# Altium PCB PCB2.PcbDoc
Units mil, origin at the board's own origin, x right, y up, seen from the top; angles counter-clockwise.
Board outline 1968.58 x 1968.74 mil, 2 copper layers (Top Layer, Bottom Layer); 26 components, 8 nets, 61 pads, 6 vias.
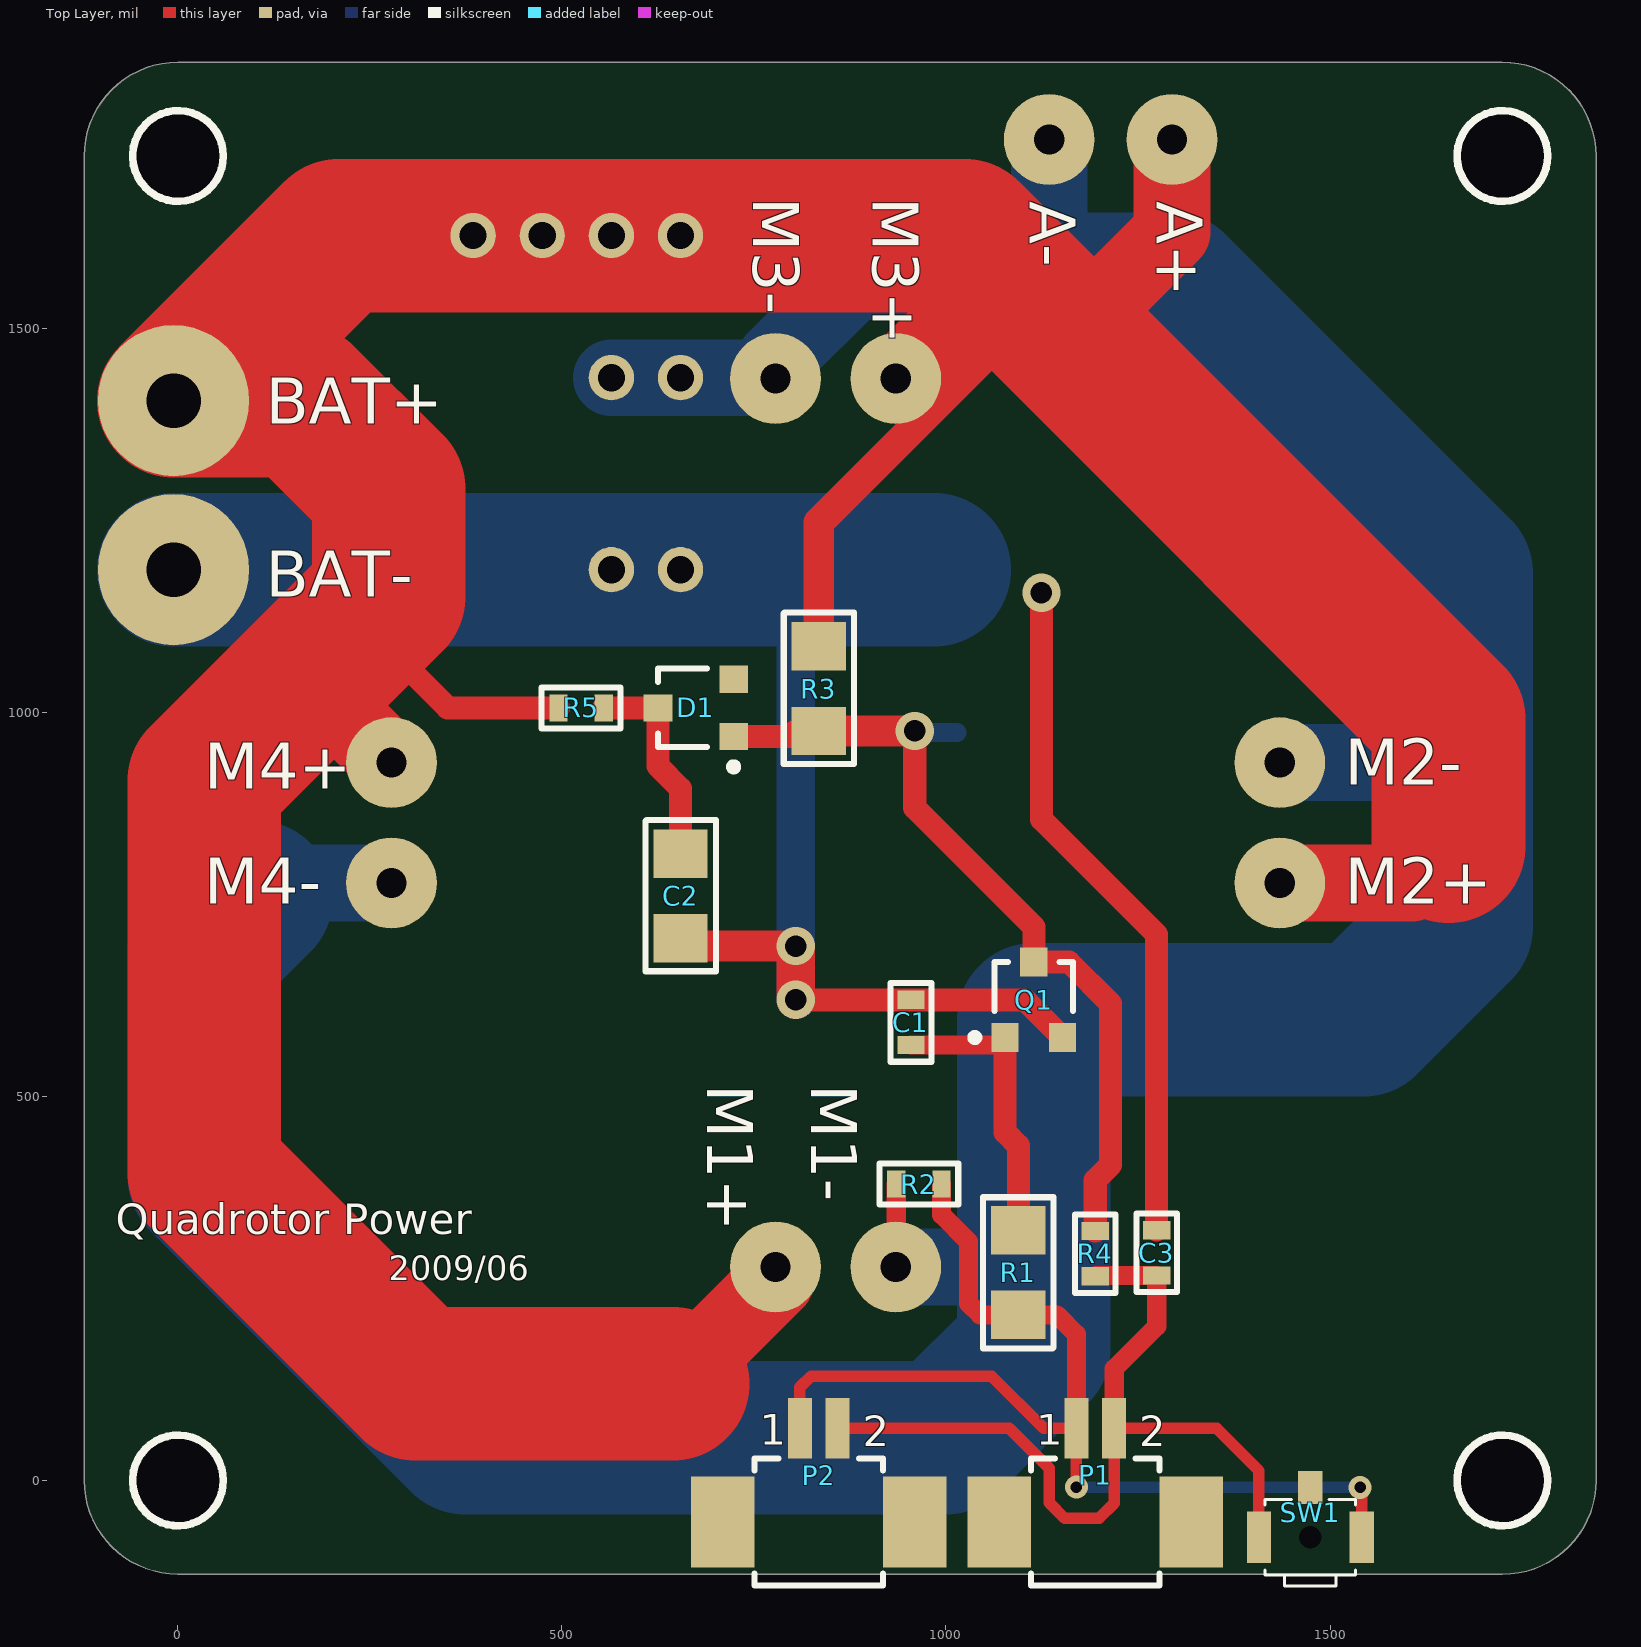
[diagram p0: Top Layer view]
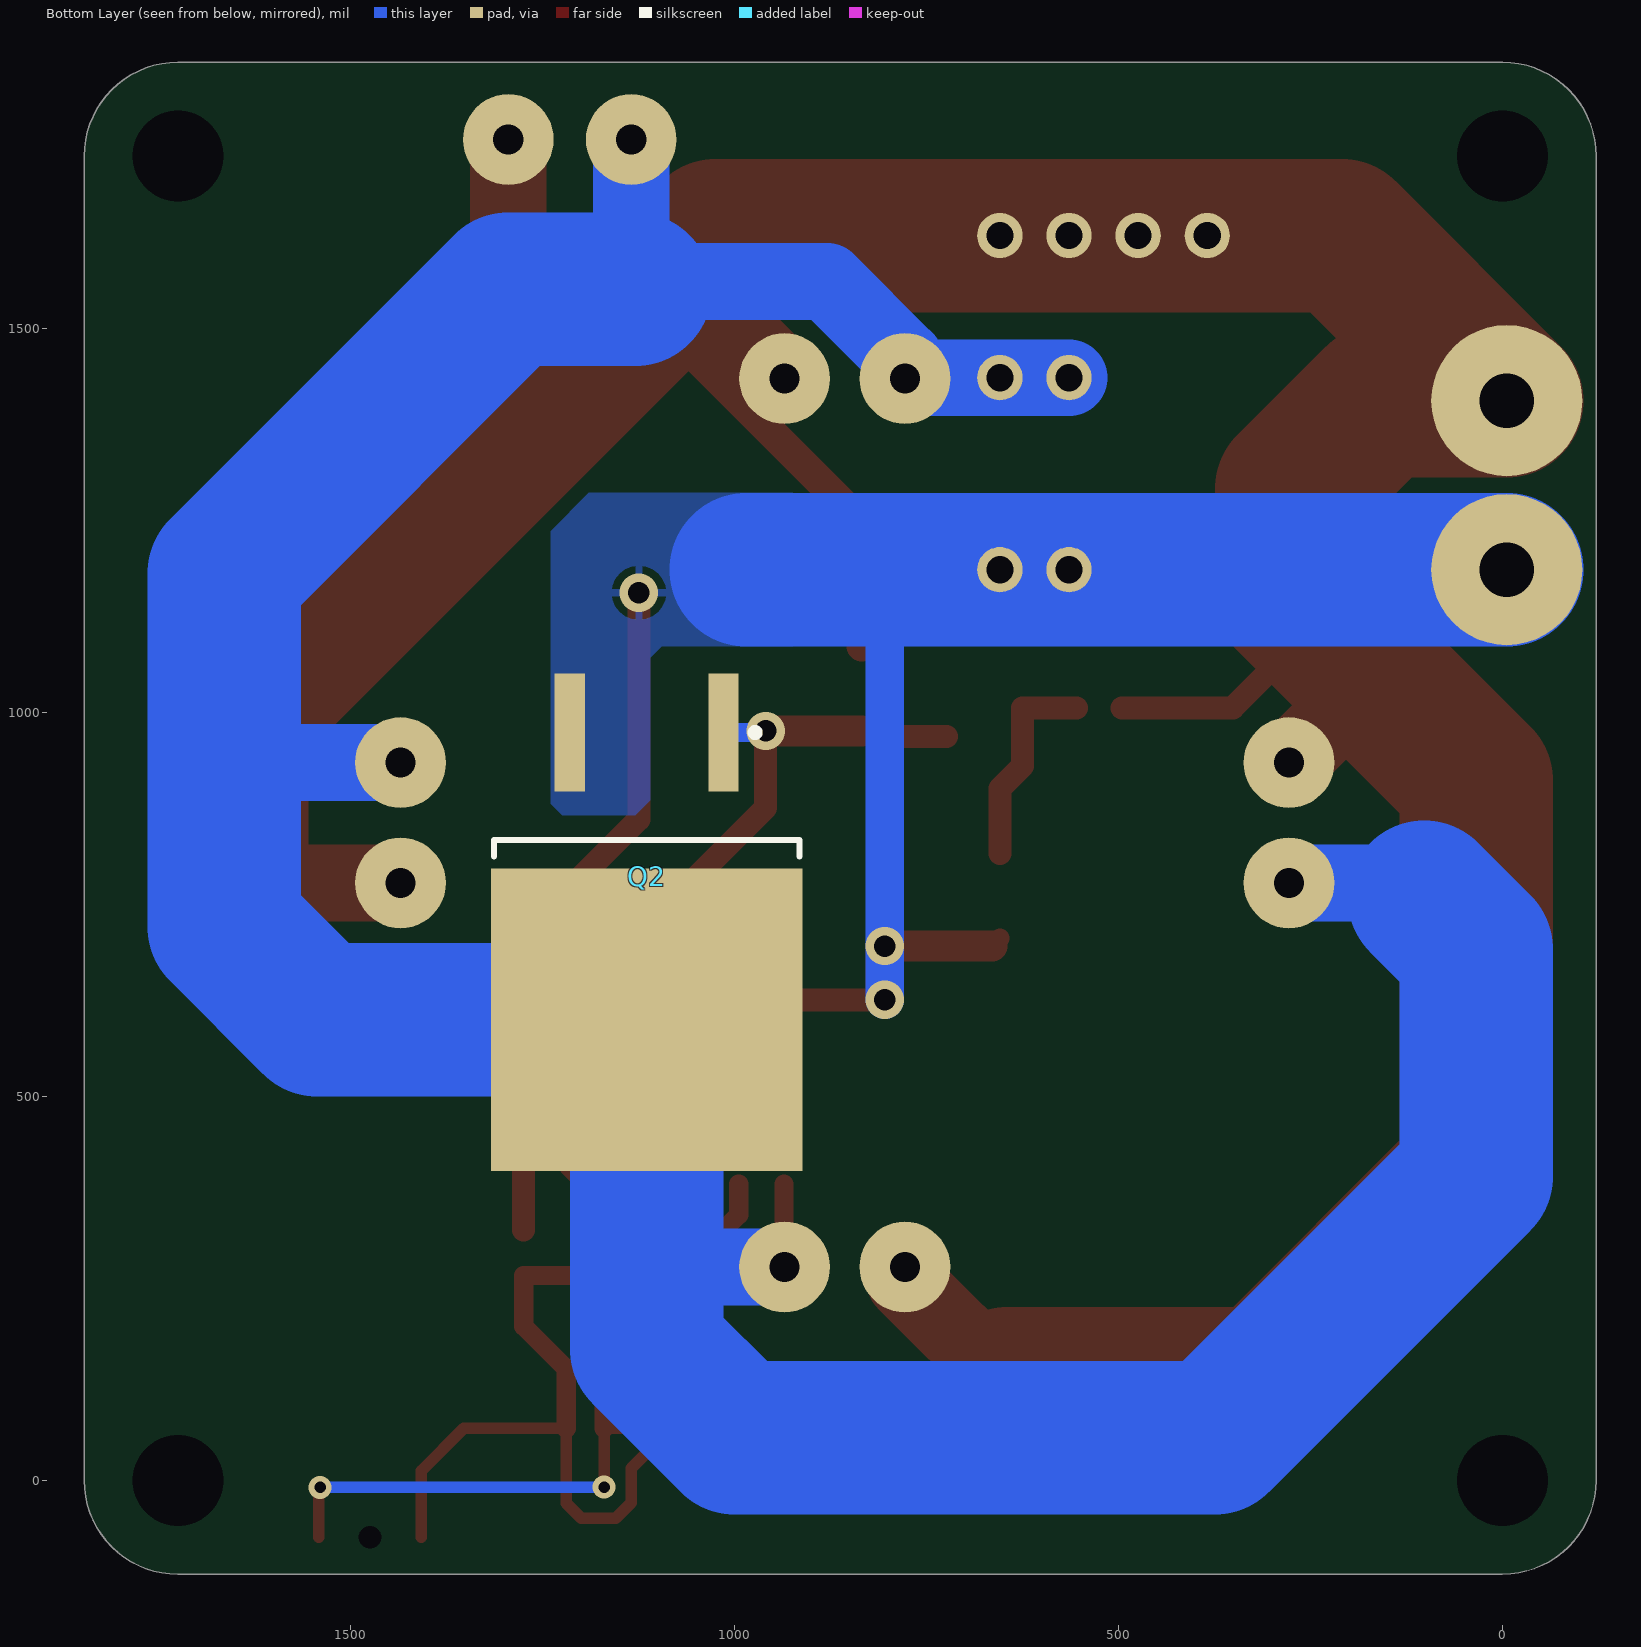
[diagram p1: Bottom Layer view, seen from below]

## Layer stack, top to bottom
Top Layer: signal copper 1.4
Dielectric: dielectric 12.6, FR-4, Dk 4.8
Bottom Layer: signal copper 1.4

## Board outline
-122.05,0 -122.05,1724.41 cw(c0,1724.41) 0,1846.46 0.08,1846.54 1724.41,1846.54 1724.41,1846.46 cw(c1724.41,1724.41) 1846.46,1724.41 1846.54,1724.33 1846.54,0 cw(c1724.41,-0.08) 1724.49,-122.2 1724.41,-121.97 0.08,-121.97 0,-122.05 cw(c0,0)

## Design rules (kind name [scope] priority, off if disabled: settings)
Clearance Clearance_1 [InPoly] p1: gap=10
Clearance [All] p2: gap=6
ComponentClearance [NOT (HasFootprint('TEST_POINT_0.5mm'))] p1: gap=10 collisioncheckmode=3 verticalgap=0 showdistances=FALSE
Height [All] p1: minheight=0 maxheight=10000 prefheight=500
HoleSize [All] p1: absolutevalues=TRUE maxlimit=196.85 minlimit=0.98 maxpercent=80.000 minpercent=20.000
MinimumSolderMaskSliver [All] p1 off: minsoldermaskwidth=10
PolygonConnect PolygonConnect_2 [All vs (InComponent('Q2'))] p1: connectstyle=Direct reliefconductorwidth=10 reliefentries=4 polygonreliefangle="90 Angle"
PolygonConnect PolygonConnect_1 [All vs IsNamedPolygon('Top Layer-No Net')] p2: connectstyle=Relief reliefconductorwidth=20 reliefentries=4 polygonreliefangle="90 Angle"
PolygonConnect [All] p3: connectstyle=Relief reliefconductorwidth=10 reliefentries=4 polygonreliefangle="90 Angle"
RoutingVias [All] p1: holewidth=15 width=30 viastyle="Through Hole" minholewidth=15 minwidth=30 maxholewidth=30 maxwidth=50
SilkToSilkClearance [All] p1 off: silktosilkclearance=10
SilkscreenOverComponentPads [All] p1 off: minsilkscreentomaskgap=10
SolderMaskExpansion SolderMaskExpansion_1 [(IsVia)] p1: expansion=0
SolderMaskExpansion [Not (IsVia)] p2: expansion=4.02
TestPointUsage [All] p1: valid=0 allowmultiple=FALSE
Testpoint [All] p1: side=15 testpointundercomponent=TRUE minsize=40 maxsize=100 preferedsize=60 minholesize=0 maxholesize=40 preferedholesize=32 testpointgrid=1 style=1023 order=0-112345678
Width [All] p1: maxlimit=200 minlimit=6 preferedwidth=10 minimp=50.000000 maximp=50.000000 favimp=50.000000
18 further rules are at their usual default settings.

## Components (designator, comment, footprint, x,y, rotation, side; value= is the part's Value field where it differs from the comment)
A+ "" BOOZ_MOTOR#1 1294.33,1745.83 r90 top
A- "" BOOZ_MOTOR#1 1134.33,1745.83 r90 top
BAT+ "" BOOZ_POWER -5.67,1405.83 r270 top
BAT- "" BOOZ_POWER -5.67,1185.83 r90 top
C1 "100nF" 0603 954.33,625.83 r270 top
C2 "CP_10uF_25V_1206" 1206 654.33,705.83 r90 top
C3 "1uF" 0603 1274.33,325.83 r270 top
D1 "BAS70" SOT23 674.33,1005.83 r90 top
M1+ "" BOOZ_MOTOR#2 734.33,205.83 r90 top
M1- "" BOOZ_MOTOR#3 974.33,205.83 r90 top
M2+ "" BOOZ_MOTOR#4 1494.33,545.83 r90 top
M2- "" BOOZ_MOTOR#5 1534.33,945.83 r90 top
M3+ "" BOOZ_MOTOR#6 2114.33,1445.83 r90 top
M3- "" BOOZ_MOTOR#7 779.33,1520.83 r90 top
M4+ "" BOOZ_MOTOR#8 174.33,1145.83 r90 top
M4- "" BOOZ_MOTOR#9 174.33,845.83 r90 top
P1 "2 Pin Header" CONN_2X1_SMT_RA_1.25MM 1194.33,-54.17 r0 top
P2 "2 Pin Header" CONN_2X1_SMT_RA_1.25MM 834.33,-54.17 r0 top
Q1 "BC847" SOT23 1114.33,625.83 r0 top
Q2 "FDB8442" TO-263AB 1114.33,725.83 r270 bottom
R1 "220R" 1206 1094.33,325.83 r270 top
R2 "470k" 0603 994.33,385.83 r180 top
R3 "10k" 1206 834.33,975.83 r90 top
R4 "1M" 0603 1194.33,265.83 r90 top
R5 "10k" 0603 554.33,1005.83 r180 top
SW1 "Push Button Switch" PUSHBUTTON_B3U 1474.33,-74.17 r180 top

## Footprints (in the part's own frame and the unit in brackets; to place one, negate y for a bottom-side part, rotate by r counter-clockwise, add the part's x,y. Pads: shape width x height; smd on the part's side, far side on the other; paste and mask are expansions set on the pad)
0603 [mm] "Non polarized 0603 footprint"
  rect 0.6x0.9 smd: 1(0,0) 2(1.5,0)
  silkscreen extent -0.55,-0.67 2.05,0.67
1206 [mm] "Non-polarized 1206 footprint"
  rect 1.6x1.8 smd: 1(0,0) 2(2.8,0)
  silkscreen extent -1.09,-1.17 3.91,1.16
BOOZ_MOTOR#1 [mm] "Motor power pad for booz power board"
  round 3 hole 1: 1(0,0)
BOOZ_MOTOR#2 [mm] "Motor power pad for booz power board"
  round 3 hole 1: 1(1.832,-1.108)
BOOZ_MOTOR#3 [mm] "Motor power pad for booz power board"
  round 3 hole 1: 1(1.832,1.008)
BOOZ_MOTOR#4 [mm] "Motor power pad for booz power board"
  round 3 hole 1: 1(5.896,1.516)
BOOZ_MOTOR#5 [mm] "Motor power pad for booz power board"
  round 3 hole 1: 1(-0.284,2.532)
BOOZ_MOTOR#6 [mm] "Motor power pad for booz power board"
  round 3 hole 1: 1(-0.284,29.964)
BOOZ_MOTOR#7 [mm] "Motor power pad for booz power board"
  round 3 hole 1: 1(-2.189,0.035)
BOOZ_MOTOR#8 [mm] "Motor power pad for booz power board"
  round 3 hole 1: 1(-5.364,-2.632)
BOOZ_MOTOR#9 [mm] "Motor power pad for booz power board"
  round 3 hole 1: 1(-1.724,-2.632)
BOOZ_POWER [mm] "power pad for booz power board"
  round 5 hole 1.8: 1(0,0)
CONN_2X1_SMT_RA_1.25MM [mm] "PicoBlade 5326 Series Header"
  rect 0.8x2 smd: 1(-0.625,3.1) 2(0.625,3.1)
  rect 2.1x3 smd: " "(3.175,0) ""(-3.175,0)
  silkscreen extent -2.12,-2.1 2.12,2.1
PUSHBUTTON_B3U [mm] "Omron ultra small tactile switch"
  round 0 hole 0.75: 0(0,0)
  rect 0.8x1.7 smd: 1(-1.7,0) 2(1.7,0)
  rect 0.8x1.1 smd: 3(0,-1.65)
  silkscreen extent -1.5,-1.25 1.5,1.6
SOT23 [mm] "SOT-23; 3 Leads; Body 3.0 x 2.6 mm, inc. leads (LxW max)"
  rect 0.9x0.95 smd: 1(-0.95,-1.25) 2(0.95,-1.25) 3(0,1.25)
  silkscreen extent -2.07,-1.38 1.3,1.25
TO-263AB [mm] "D2-PAK, 3-Pads, Body 9.4x10.1mm (max), IPC Medium Density"
  rect 3.9x1 smd: 1(-6.3,2.54) 3(-6.3,-2.54)
  rect 10x10.3 smd: 4(3.2,0)
  silkscreen extent -6.42,-5.05 -2.2,5.05, body extent -2.75,-5.05 6.65,5.05, height 4.7

## Part data
A+ A- BAT+ BAT- M1+ M1- M2+ M2- M3+ M3- M4+ M4-: library part JP_BOOZ_PAD, "Pad for booz power board"
C1: library part "CP_100nF 0603", "CAP CER .10UF 50V X5R 0603"
C2: "CAP CER 10uF 25V X5R 1206"
C3: library part "CP_1uF 0603", "CAP CER 1.0UF 50V X5S 0603"
D1: library part DS_BAS70, "DIODE SCHOTTKY 70V 200MA SOT23"
P1 P2: library part "JP_2PIN HDR_SMT_RA_MOLEX", "CONN HDR VERT 2POS .100\" SNGL"
Q1: library part TN_BC847, "TRANS NPN GP 100MA 45V SOT23"
Q2: library part TF_FDB8442, "MOSFET N-CH 40V 80A D2PAK"
R1: library part "RS_220R 1206", "RES 220 OHM 1/4W 1% 1206 SMD"
R2: library part "RS_470k 0603", "RES 470K OHM 1/10W 5% 0603 SMD"
R3: library part "RS_10k 1206", "RES 10.0K OHM 1/4W 1% 1206 SMD"
R4: library part "RS_1M 0603", "RES 1.00M OHM 1/10W 1% 0603 SMD"
R5: library part "RS_10k 0603", "RES 10.0K OHM 1/10W 1% 0603 SMD"
SW1: library part "SW_TACT 3MM RT", "SWITCH TACT RT ANG SPST SMD"

## Free pads (board coordinates)
  round 0 hole 118.11: ""(0,0) ""(0,1724.41) ""(1724.41,0) ""(1724.41,1724.41)
  round 59.06 hole 35.43: ""(384.33,1620.83) ""(474.33,1620.83) ""(564.33,1185.83) ""(564.33,1435.83) ""(564.33,1620.83) ""(654.33,1185.83) ""(654.33,1435.83) ""(654.33,1620.83)

## Via types
v1: diameter 50, hole 28, Top Layer to Bottom Layer, 4 vias
v2: diameter 30, hole 15, Top Layer to Bottom Layer, 2 vias

## Nets (pads, with @x,y where several pads share a name; then routed paths per layer and width w, separated by ;. In a path a pad name is that pad's centre, name@x,y a point inside that pad or via, vN(x,y) a via of type N, cw(c..) or ccw(c..) an arc to the next point about the centre after c; other vN are vias at no path point)
GND: BAT-.1 C1.1 C2.1 C3.1 pad.@564.33,1185.83 pad.@654.33,1185.83 Q1.2 Q2.3 | length 3030.3
  Top Layer w25: C2.1 C2.1@664.33,695.83 ; v1@804.33,635.83 v1@814.33,625.83
  Top Layer w30: v1@814.33,625.83 C1.1 1102.52,625.83 Q1.2 ; v1(1124.33,1155.83) 1124.33,860.83 1274.33,710.83 C3.1
  Top Layer w40: C2.1@664.33,695.83 v1(804.33,695.83)
  Top Layer w50: v1@804.33,635.83 v1(804.33,695.83)
  Bottom Layer w50: 799.33,1185.83 804.33,1180.83 v1(804.33,695.83) v1(804.33,625.83)
  Bottom Layer w200: BAT-.1 799.33,1185.83 984.33,1185.83
NetA+_1: A+.1 BAT+.1 M1+.1 M2+.1 M3+.1 M4+.1 pad.@384.33,1620.83 pad.@474.33,1620.83 pad.@564.33,1620.83 pad.@654.33,1620.83 R3.2 R5.2 | length 6119.7
  Top Layer w30: 240.17,1116.67 351.02,1005.83 R5.2
  Top Layer w40: R3.2 834.33,1247.1 1116.2,1528.96
  Top Layer w100: 168.65,1043.95 M4+.1 ; 644.33,125.83 777.95,259.45 M1+.1 ; M3+.1 1024.33,1524.33 ; 1157.13,1488.03 1294.33,1625.23 A+.1 ; M2+.1 1606.46,777.95 1654.33,825.83
  Top Layer w200: 644.33,125.83 309.33,125.83 34.33,400.83 34.33,910.83 274.33,1150.83 274.33,1290.83 159.33,1405.83 BAT+.1 209.33,1620.83 1024.33,1620.83 1157.13,1488.03 1654.33,990.83 1654.33,825.83
NetA-_1: A-.1 M1-.1 M2-.1 M3-.1 M4-.1 pad.@564.33,1435.83 pad.@654.33,1435.83 Q2.4 R2.2 | length 5372.7
  Top Layer w25: M1-.1@935.28,278.58 R2.2
  Top Layer w50: M1-.1 M1-.1@935.28,278.58
  Bottom Layer w50: 1111.46,277.95 1114.33,280.83 ; Q2.4 Q2.4@1114.33,614.33 ; 1119.33,1560.83 1134.33,1575.83 ; 1658.15,934.65 1664.33,940.83
  Bottom Layer w100: 102.04,758.99 102.04,763.54 116.46,777.95 M4-.1 ; pad.@564.33,1435.83 776.77,1435.83 M3-.1 777.95,1459.45 879.33,1560.83 1119.33,1560.83 ; M1-.1 1111.46,277.95 ; 1134.33,1575.83 A-.1 ; M2-.1 1658.15,934.65
  Bottom Layer w200: 102.04,758.99 34.33,691.28 34.33,395.83 374.33,55.83 999.33,55.83 1114.33,170.83 1114.33,280.83 Q2.4 1543.35,599.84 1664.33,720.83 1664.33,940.83 1664.33,1180.83 1294.33,1550.83 1129.33,1550.83
NetC1_2: C1.2 Q1.1 R1.1 | length 384.7
  Top Layer w20: Q1.1@1067.09,566.77 Q1.1
  Top Layer w25: C1.2 Q1.1@1067.09,566.77
  Top Layer w30: Q1.1 1076.93,453.23 1094.33,435.83 R1.1
NetC2_2: C2.2 D1.3 R5.1 | length 272.7
  Top Layer w30: R5.1 D1.3 625.12,930.04 654.33,900.83 C2.2
NetC3_2: C3.2 P1.2 P2.2 R4.1 SW1.2 | length 1139.5
  Top Layer w15: P2.2 1082.28,67.87 1134.33,15.83 1134.33,-29.17 1154.33,-49.17 1199.33,-49.17 1218.94,-29.57 P1.2 1352.28,67.87 1407.4,12.76 SW1.2
  Top Layer w25: R4.1@1195.28,266.77 C3.2 1274.33,200.83 1218.94,145.43 P1.2
NetD1_1: D1.1 Q1.3 Q2.1 R3.1 R4.2 | length 1095.5
  Top Layer w25: R3.1@824.33,975.83 R3.1
  Top Layer w30: D1.1 796.93,968.43 804.33,975.83 R3.1 ; v1(959.33,975.83) 959.33,875.83 1114.33,720.83 Q1.3 1160.12,675.04 1214.33,620.83 1214.33,410.83 1194.33,390.83 R4.2
  Top Layer w40: R3.1 v1(959.33,975.83)
  Bottom Layer w25: v1@959.33,973.86 Q2.1
NetP1_1: P1.1 P2.1 R1.2 R2.1 SW1.1 | length 1427.4
  Top Layer w15: P2.1 809.72,121.22 824.33,135.83 1059.33,135.83 1127.28,67.87 P1.1 v2(1169.72,-8.78) ; v2(1539.33,-9.17) 1541.26,-11.1 SW1.1
  Top Layer w25: 994.33,366.77 R2.1 994.33,345.83 1029.33,310.83 1029.33,230.83 1044.57,215.59 R1.2 1144.57,215.59 1169.72,190.43 P1.1
  Bottom Layer w15: v2(1169.72,-8.78) v2@1538.94,-8.78
pads on no net: "P1. " "P2. " D1.2 P1. P2. SW1.0 SW1.3

## Polygon pours and split planes (outlines as drawn)
GND on Bottom Layer "Top_GND" (solid, pour order 1000): 924.33,1285.83 1189.33,1285.83 1239.33,1235.83 1239.33,880.83 1224.33,865.83 1129.33,865.83 1109.33,885.83 1109.33,1070.83 1094.33,1085.83 924.33,1085.83

## Silkscreen, mask and mechanical layers (free items; w line width, h text height)
Top Overlay:
  circle w10: c0,1724.41 r59.06
  circle w10: c0,0 r59.06
  circle w10: c1724.41,1724.41 r59.06
  circle w10: c1724.41,0 r59.06
  text "Quadrotor Power" at -80.67,320.83 h40
  text "2009/06" at 274.33,260.83 h32
Mechanical 1:
  lines w10: 0,-122.05 cw(c0,0) -122.05,0 -122.05,1724.41 cw(c0,1724.41) 0,1846.46 ; 0.08,-121.97 1724.41,-121.97 ; 0.08,1846.54 1724.41,1846.54 ; 1724.41,1846.46 cw(c1724.41,1724.41) 1846.46,1724.41 ; 1724.49,-122.2 ccw(c1724.41,-0.08) 1846.54,0 1846.54,1724.33

## Text inside footprints (layer, text, board x,y; h text height)
P1: Top Overlay "1" at 1117.56,46.22 h39.37; Top Overlay "2" at 1251.42,44.25 h39.37
P2: Top Overlay "1" at 757.56,46.22 h39.37; Top Overlay "2" at 891.42,44.25 h39.37